# Altium PCB 采集主板V1.1_ZM_20210713.PcbDoc (part 2 of 2)
Units mm, origin at the board's own origin, x right, y up, seen from the top; angles counter-clockwise.
Board outline 130 x 65 mm, 4 copper layers (Top Layer, GND, Power, Bottom Layer), stack 0.778 mm thick; 185 components, 114 nets, 544 pads, 485 vias.
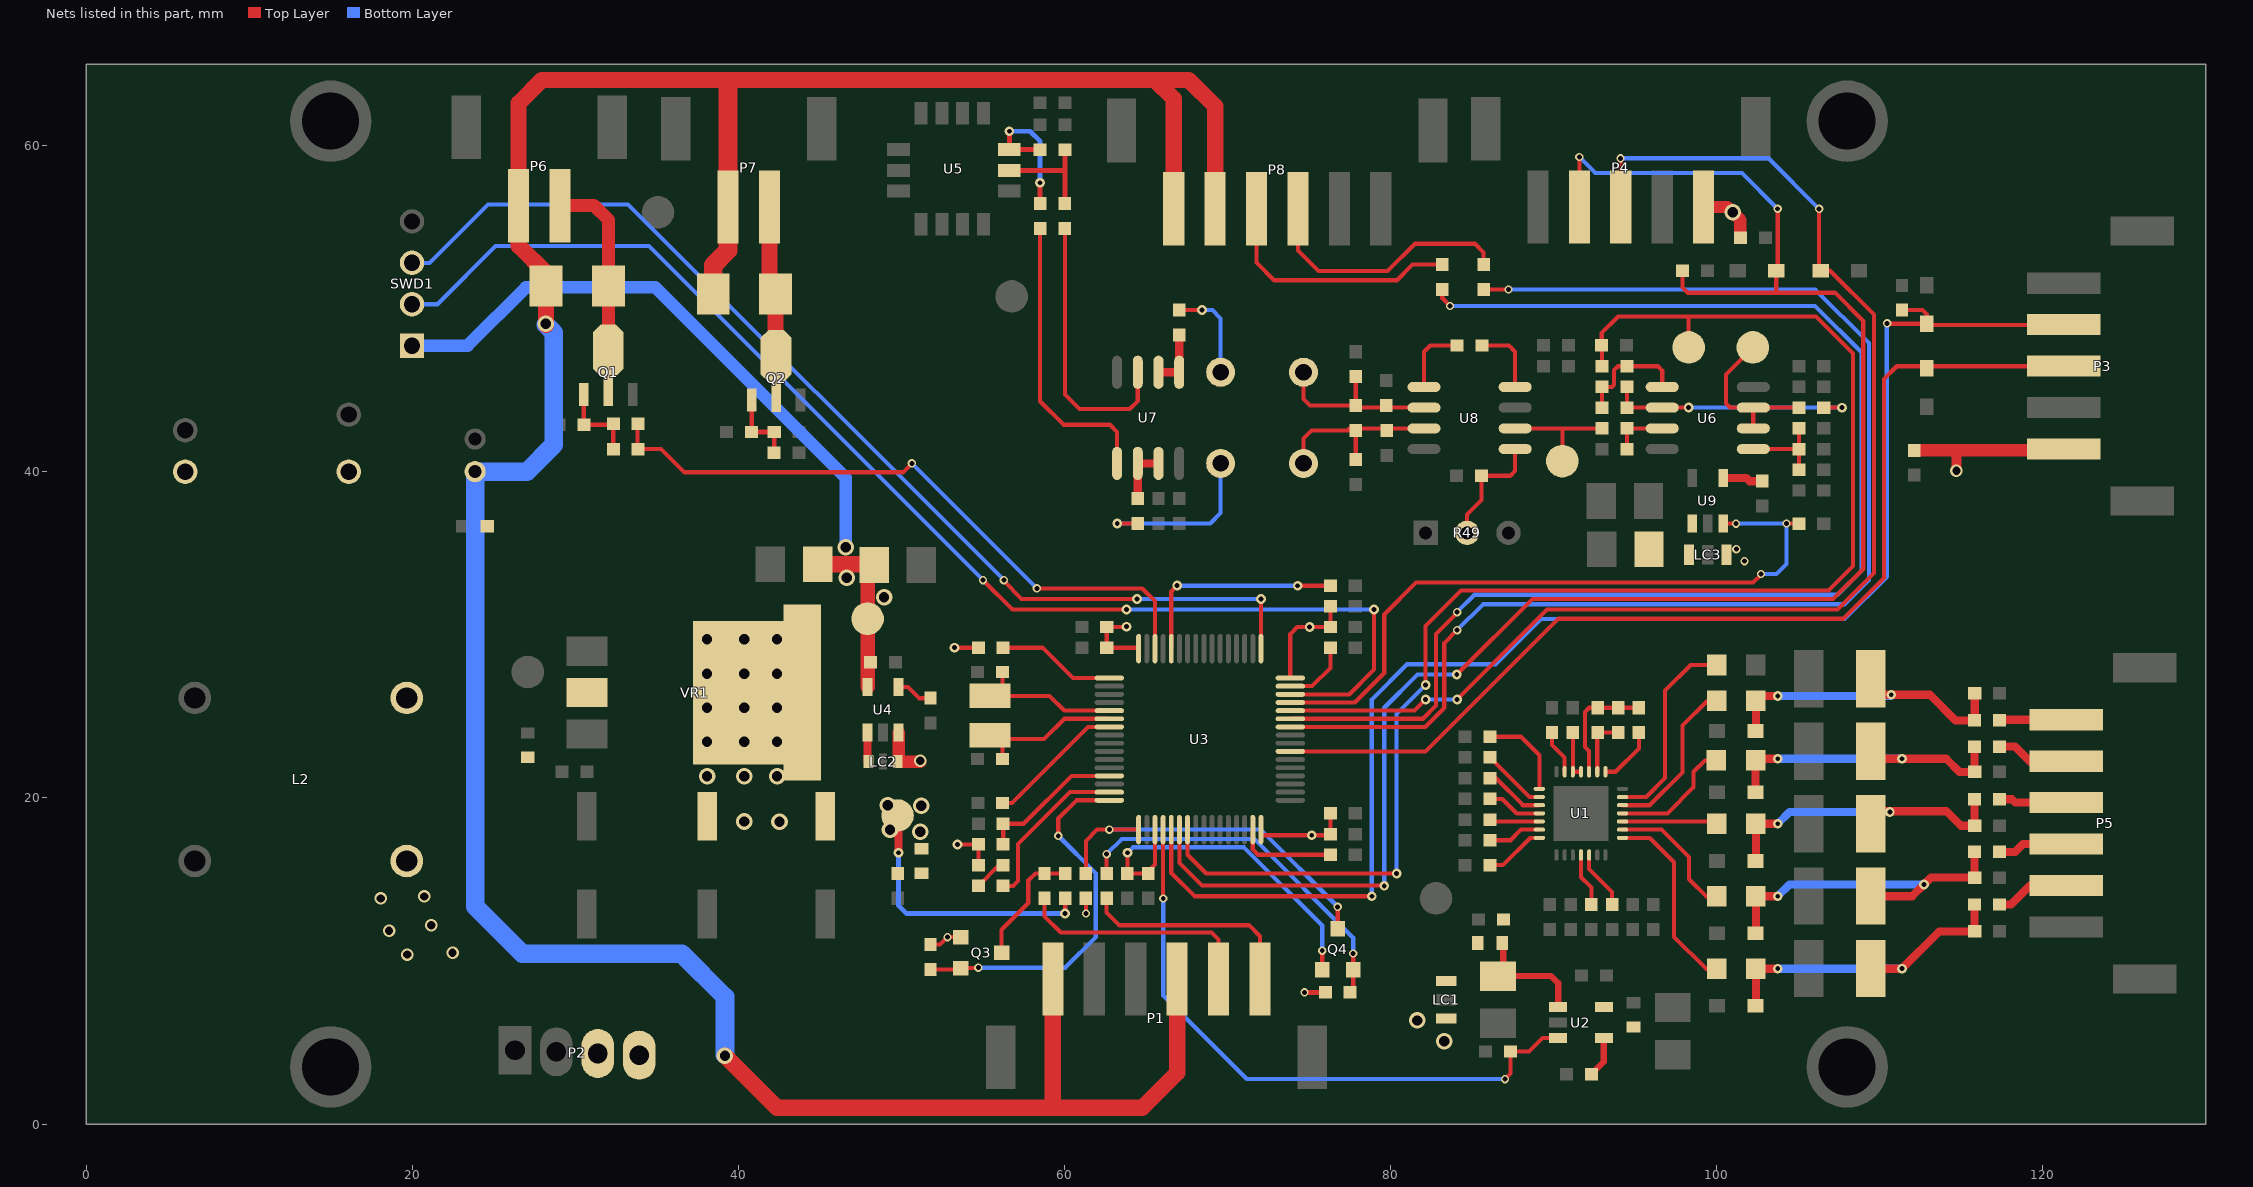
[diagram p4: the nets of this part, all layers, seen from the top]

## Via types
v1: diameter 0.762, hole 0.508, Top Layer to Bottom Layer, tented both sides, 331 vias
v2: diameter 1.016, hole 0.635, Top Layer to Bottom Layer, tented both sides, 61 vias
v3: diameter 0.6, hole 0.3, Top Layer to Bottom Layer, tented both sides, 49 vias
v4: diameter 0.508, hole 0.305, Top Layer to Bottom Layer, tented both sides, 44 vias

## Nets (pads, with @x,y where several pads share a name; then routed paths per layer and width w, separated by ;. In a path a pad name is that pad's centre, name@x,y a point inside that pad or via, vN(x,y) a via of type N, cw(c..) or ccw(c..) an arc to the next point about the centre after c; other vN are vias at no path point) (continued)
NetC3_1: C3.1 C4.1 C5.2 FB3.1 VR1.2 | length 0.1
  Top Layer w1: C4.1@45.32,18.875 C4.1@45.368,18.923
  other v2: 40.367,18.55 42.526,18.542 38.081,21.336 40.367,21.336 42.375,21.336 38.081,23.431 40.367,23.431 42.375,23.431 38.081,25.527 40.367,25.527 42.375,25.527 38.081,27.622 40.367,27.622 42.375,27.622 38.081,29.718 40.367,29.718 42.375,29.718
NetC6_2: C6.2 U1.26 | length 3.6
  Top Layer w0.254: U1.26@92.175,16.5 92.175,15.629 93.58,14.224 C6.2@93.58,13.462
NetC7_1: C7.1 R22.1 U1.9 | length 3.7
  Top Layer w0.254: U1.9@92.675,21.6 C7.1@92.675,23.987 ; C7.1@92.691,24.003 R22.1@93.961,24.003
NetC7_2: C7.2 R20.2 R22.2 U1.10 | length 7.2
  Top Layer w0.254: U1.10@92.175,21.6 92.175,22.868 91.929,23.114 91.929,25.273 92.183,25.527 C7.2@92.691,25.527 R22.2@93.961,25.527 R20.2@95.231,25.527
NetC8_2: C8.2 U1.11 U1.12 | length 2.9
  Top Layer w0.254: C8.2@91.167,24.003 91.175,23.995 U1.12@91.175,21.6 U1.11@91.675,21.6
NetC13_1: C13.1 C66.1 FB1.2 U2.1 | length 7.7
  Top Layer w0.381: FB1.2@86.913,11.282 86.913,9.388 C13.1@86.595,9.07 89.844,9.07 90.275,8.639 U2.1@90.275,7.173
NetC16_1: C16.1 Q1.1 R27.1 R29.1 | length 5.2
  Top Layer w0.254: Q1.1@30.522,44.742 R29.1@30.522,42.886 32.274,42.886 R27.1@32.331,42.943 C16.1@32.331,41.39
NetC17_1: C17.1 Q2.1 R28.1 R30.1 | length 4.6
  Top Layer w0.3: Q2.1@40.819,44.393 40.819,42.461 R30.1@40.795,42.437 R28.1@42.202,42.437 42.202,41.177 C17.1@42.192,41.167
NetC20_2: C20.2 U3.31 | length 6.1
  Top Layer w0.254: U3.31@71.55,18.05 71.55,16.823 71.863,16.51 C20.2@76.308,16.51
NetC21_2: C21.2 U3.47 | length 4.2
  Top Layer w0.254: U3.47@73.85,26.85 75.19,26.85 76.308,27.968 C21.2@76.308,29.21
NetC22_2: C22.2 L1.1 U3.13 | length 9
  Top Layer w0.254: L1.1@56.242,17.145 C22.2@56.242,18.415 57.488,18.415 60.423,21.35 U3.13@62.75,21.35
NetC23_1: C23.1 U3.7 | length 8.5
  Top Layer w0.254: C23.1@56.212,19.685 56.775,19.685 61.44,24.35 U3.7@62.75,24.35
NetC35_2: C35.2 C39.1 C40.1 R36.1 U8.2 | length 10.9
  Top Layer w0.254: C35.2@74.657,46.101 74.657,44.45 75.05,44.057 C40.1@77.86,44.057 C39.1@77.86,45.835 ; C40.1@77.987,43.93 U8.2@82.051,43.93
NetC36_1: C36.1 R35.1 R43.2 U6.2 | length 15.5
  Top Layer w0.254: C36.1@94.497,45.2 R35.1@94.497,43.93 U6.2@96.656,43.93 v3@98.267,43.93 ; R43.2@106.562,43.93 v3(107.677,43.93)
  Bottom Layer w0.254: v3(98.279,43.942) v3@107.665,43.942
NetC36_2: C36.2 R35.2 R38.1 U6.1 | length 7.1
  Top Layer w0.254: R35.2@92.973,43.93 C36.2@92.973,45.2 93.568,45.2 93.707,45.339 93.707,46.228 93.949,46.47 R38.1@94.497,46.47 96.386,46.47 96.656,46.2 U6.1@96.656,45.2
NetC40_2: C40.2 C44.2 C48.1 R42.2 U8.3 | length 11.3
  Top Layer w0.254: C48.1@74.657,40.513 74.657,42.037 75.153,42.533 C40.2@77.86,42.533 C44.2@77.86,40.755 ; 77.463,42.66 U8.3@82.051,42.66
NetC41_1: C41.1 R41.2 U5.14 | length 9
  Top Layer w0.3: v3(56.618,60.878) U5.14@56.618,59.752 C41.1@58.506,59.752 ; R41.2@58.506,56.45 v3(58.506,57.72)
  Bottom Layer w0.3: v3(56.618,60.878) 57.888,60.878 58.506,60.26 v3(58.506,57.72)
NetC41_2: C41.2 R37.2 U5.13 | length 6.7
  Top Layer w0.3: U5.13@56.618,58.482 60.03,58.482 ; R37.2@60.03,56.45 60.03,58.482 ; C41.2@60.03,59.752 60.03,58.482
NetC42_2: C42.2 R39.2 U6.3 | length 3.4
  Top Layer w0.254: C42.2@94.497,41.39 R39.2@94.497,42.66 U6.3@96.656,42.66
NetC43_1: C43.1 R38.2 TP7.1 U3.23 | length 92.2
  Top Layer w0.254: U3.23@67.55,18.05 67.55,16.51 68.693,15.367 v3(80.372,15.367) ; v3(82.15,26.924) 82.15,30.542 84.32,32.712 106.867,32.712 108.366,34.211 108.366,47.242 106.078,49.53 98.279,49.53 ; C43.1@92.945,47.752 92.945,48.514 93.961,49.53 98.279,49.53 ; R38.2@92.973,46.47 C43.1@92.973,47.724 ; TP7.1@98.279,47.625 98.279,49.53
  Bottom Layer w0.254: v3(80.372,15.367) 80.372,25.146 v3(82.15,26.924)
NetC45_2: C45.2 R49.2 U8.5 | length 7.4
  Top Layer w0.254: R49.2@84.69,36.25 84.69,37.383 85.579,38.272 C45.2@85.579,39.751 87.336,39.751 87.639,40.054 U8.5@87.639,41.39
NetC49_2: C49.2 R44.2 R45.2 U6.5 | length 5.3
  Top Layer w0.254: U6.5@102.244,41.39 R45.2@105.038,41.39 ; R44.2@105.038,40.12 R45.2@105.038,41.39 ; C49.2@105.038,42.66 R45.2@105.038,41.39
NetC50_1: C50.1 LC3.1 U9.1
NetC57_2: C57.2 U2.4 | length 2.5
  Top Layer w0.381: C57.2@92.31,3.048 93.075,3.813 U2.4@93.075,5.273
NetC64_2: C64.2 U9.4 | length 2.5
  Top Layer w0.508: U9.4@100.4,39.615 101.814,39.615 102.008,39.422 C64.2@102.795,39.422
NetC65_2: C65.2 U4.4 | length 2.2
  Top Layer w0.254: U4.4@49.826,26.8 50.392,26.8 51.08,26.112 C65.2@51.783,26.112
NetC67_2: C67.2 DS5.1 R17.1 R25.2 TVS9.2 | length 19
  Top Layer w0.5: TVS9.2@102.4,24.295 R17.1@102.4,25.95 102.4,26.15 102.505,26.255 v3(103.74,26.255) ; DS5.1@109.4,26.255 109.87,26.255 109.941,26.326 v3(110.705,26.326) 113.072,26.326 114.644,24.754 R25.2@115.813,24.754 115.824,24.765 C67.2@115.824,26.416
  Bottom Layer w0.5: v3(103.74,26.255) v3@110.705,26.255
NetC68_2: C68.2 DS4.1 R16.1 R47.2 TVS8.2 | length 19.3
  Top Layer w0.5: TVS8.2@102.38,20.35 R16.1@102.38,22.3 102.38,22.38 102.4,22.4 v3(103.74,22.4) ; DS4.1@109.45,22.4 v3(111.36,22.4) 114.076,22.4 114.886,21.59 C68.2@115.824,21.59 115.813,21.601 R47.2@115.813,23.141
  Bottom Layer w0.5: v3(103.74,22.4) v3(111.36,22.4)
NetC69_2: C69.2 DS3.1 R15.1 R51.2 TVS7.2 | length 19.5
  Top Layer w0.5: TVS7.2@102.4,16.149 R15.1@102.4,18.415 v3(103.74,18.415) ; DS3.1@109.45,18.415 110.212,19.177 114.099,19.177 114.988,18.288 C69.2@115.824,18.288 115.813,18.299 R51.2@115.813,19.914
  Bottom Layer w0.5: v3(103.74,18.415) 104.461,19.136 v3(110.616,19.136)
NetC70_2: C70.2 DS2.1 R13.1 R52.2 TVS6.2 | length 21.3
  Top Layer w0.5: TVS6.2@102.4,11.704 R13.1@102.4,13.97 v3(103.74,13.97) ; DS2.1@109.45,13.97 111.991,13.97 v3(112.713,14.692) 113.134,15.113 C70.2@115.824,15.113 115.813,15.124 R52.2@115.813,16.688
  Bottom Layer w0.5: v3(103.74,13.97) 104.462,14.692 v3(112.713,14.692)
NetC71_2: C71.2 DS1.1 R11.1 R53.2 TVS5.2 | length 20.2
  Top Layer w0.5: TVS5.2@102.4,7.259 R11.1@102.4,9.525 v3(103.74,9.525) ; DS1.1@109.45,9.525 v3(111.36,9.525) 113.646,11.811 C71.2@115.824,11.811 115.813,11.822 R53.2@115.813,13.462
  Bottom Layer w0.5: v3(103.74,9.525) v3(111.36,9.525)
NetD1_1: D1.1 P6.2 Q1.2 | length 11.3
  Top Layer w0.8: P6.2@29.064,56.321 31.157,56.321 32.034,55.443 D1.1@32.034,51.397 32.034,47.454 Q1.2@32.022,47.442
NetD2_1: D2.1 P7.2 Q2.2 | length 11.3
  Top Layer w0.8: Q2.2@42.319,46.193 Q2.2@42.319,47.093
  Top Layer w1: P7.2@41.909,56.236 41.909,51.273 D2.1@42.282,50.9 42.282,46.23 Q2.2@42.319,46.193 ; Q2.2@42.319,47.093 Q2.2@42.422,47.196
NetFB1_1: FB1.1 LC1.1
NetFB2_1: FB2.1 U2.5
NetLC2_1: LC2.1 U4.1 | length 1.8
  Top Layer w0.5: U4.1@47.926,24 47.926,22.275 LC2.1@47.976,22.225
NetLED1_1: LED1.1 R26.2 | length 2.1
  Top Layer w0.254: LED1.1@54.718,14.605 55.988,15.875 R26.2@56.242,15.875
NetLED1_2: LED1.2 U3.15 | length 10.2
  Top Layer w0.254: LED1.2@56.242,14.605 56.855,14.605 57.161,14.911 57.161,17.175 60.336,20.35 U3.15@62.75,20.35
NetP3_2: P3.2 R5.2 TVS1.2 U3.21 | length 90.9
  Top Layer w0.254: U3.21@66.55,18.05 66.55,15.399 67.979,13.97 v3(78.848,13.97) ; v4(110.45,49.104) 110.479,49.075 TVS1.2@112.884,49.075 112.884,49.656 112.629,49.911 R5.2@111.36,49.911 ; TVS1.2@112.884,49.01 121.273,49.01 P3.2@121.285,49.022
  Bottom Layer w0.254: v3(78.848,13.97) 78.848,26.035 81.007,28.194 86.429,28.194 89.209,30.975 107.843,30.975 110.429,33.56 v4@110.429,49.049
NetP3_3: P3.3 TVS4.2 U3.39 | length 64.4
  Top Layer w0.254: U3.39@73.85,22.85 82.15,22.85 90.288,30.988 107.763,30.988 110.264,33.489 110.264,45.695 111.039,46.47 121.273,46.47 P3.3@121.285,46.482
NetP4_2: P4.2 R6.2 TVS2.2 U3.22 | length 108.7
  Top Layer w0.254: U3.22@67.05,18.05 67.05,16.009 68.434,14.625 v3@79.61,14.625 ; v3(84.055,27.559) 88.696,32.2 107.138,32.2 108.985,34.047 108.985,49.238 107.242,50.981 103.65,50.981 ; P4.2@91.576,56.236 v4(91.576,59.297) ; R6.2@97.898,52.324 97.898,51.302 98.219,50.981 103.65,50.981 ; TVS2.2@103.65,52.324 103.65,50.981 ; TVS2.2@103.74,52.414 v4@103.74,56.122
  Bottom Layer w0.254: v3(79.61,14.605) 79.61,25.527 81.642,27.559 v3(84.055,27.559) ; v4(91.576,59.297) 92.553,58.32 101.542,58.32 v4(103.735,56.127) v4@103.74,56.122
NetP4_3: P4.3 TVS3.2 U3.44 | length 79.7
  Top Layer w0.254: U3.44@73.85,25.35 81.465,25.35 v3(82.15,26.035) ; v3(84.083,26.035) 89.598,31.55 107.402,31.55 109.644,33.791 109.644,49.63 106.95,52.324 TVS3.2@106.37,52.324 ; P4.3@94.116,56.236 v4@94.116,59.252 ; TVS3.2@106.28,52.414 v4(106.28,56.122)
  Bottom Layer w0.254: v3(82.15,26.035) v3(84.083,26.035) ; v4(94.093,59.223) 103.179,59.223 v4(106.28,56.122)
NetP5_1: P5.1 R25.1 | length 4.1
  Top Layer w0.5: R25.1@117.337,24.754 117.373,24.79 P5.1@121.438,24.79
NetP5_2: P5.2 R47.1 | length 4.5
  Top Layer w0.5: R47.1@117.337,23.141 118.284,23.141 119.174,22.25 P5.2@121.438,22.25
NetP5_3: P5.3 R51.1 | length 4.2
  Top Layer w0.5: R51.1@117.337,19.914 118.102,19.914 118.306,19.71 P5.3@121.438,19.71
NetP5_4: P5.4 R52.1 | length 4.3
  Top Layer w0.5: R52.1@117.337,16.688 118.303,16.688 118.784,17.17 P5.4@121.438,17.17
NetP5_5: P5.5 R53.1 | length 4.6
  Top Layer w0.5: R53.1@117.337,13.462 118.043,13.462 119.211,14.63 P5.5@121.438,14.63
NetP8_3: P8.3 R33.1 | length 15.5
  Top Layer w0.254: P8.3@71.777,56.127 71.777,52.826 72.862,51.741 80.385,51.741 81.349,52.705 R33.1@83.166,52.705
NetP8_4: P8.4 R34.1 | length 16
  Top Layer w0.254: P8.4@74.317,56.127 74.317,53.563 75.569,52.311 79.816,52.311 81.486,53.982 85.175,53.982 85.706,53.451 R34.1@85.706,52.82
NetQ3_2: Q3.2 R54.1 U3.16 | length 22.8
  Top Layer w0.254: R54.1@51.783,9.477 53.557,9.477 Q3.2@53.64,9.56 54.692,9.56 v4(54.717,9.585) ; v4(59.618,17.676) 59.618,18.731 60.738,19.85 U3.16@62.75,19.85
  Bottom Layer w0.254: v4(54.717,9.585) 60.049,9.585 61.922,11.458 61.922,15.373 v4(59.618,17.676)
NetQ3_3: Q3.3 R3.2 R4.1 | length 7.7
  Top Layer w0.254: Q3.3@56.14,10.51 56.14,11.915 57.777,13.552 57.777,14.929 58.215,15.367 R3.2@58.777,15.367 R4.1@60.047,15.367 R4.1@60.125,15.445
NetQ4_2: Q4.2 R1.2 R2.2 | length 22.6
  Top Layer w0.254: R2.2@62.587,15.367 v4(62.587,16.55) ; R1.2@77.52,8.071 77.708,8.259 Q4.2@77.708,9.466 v4(77.708,10.459)
  Bottom Layer w0.254: v4(62.587,16.55) 63.515,17.478 71.648,17.478 77.708,11.419 v4(77.708,10.459)
NetQ4_3: Q4.3 R55.2 U3.17 | length 22.8
  Top Layer w0.254: R55.2@61.317,15.367 61.317,17.364 62.003,18.05 v4(62.75,18.05) U3.17@64.55,18.05 ; Q4.3@76.758,11.966 v4(76.758,13.322)
  Bottom Layer w0.254: v4(62.75,18.05) 72.03,18.05 v4(76.758,13.322)
NetR7_2: R7.2 U1.20 | length 3.3
  Top Layer w0.254: R7.2@86.087,17.399 87.357,17.399 88.008,18.05 U1.20@89.125,18.05
NetR8_2: R8.2 U1.19 | length 3.1
  Top Layer w0.254: R8.2@86.087,18.669 86.206,18.55 U1.19@89.125,18.55
NetR9_2: R9.2 U1.18 | length 3.4
  Top Layer w0.254: R9.2@86.087,19.939 86.849,19.939 87.738,19.05 U1.18@89.125,19.05
NetR10_2: R10.2 U1.17 | length 3.7
  Top Layer w0.254: R10.2@86.087,21.209 86.449,21.209 88.108,19.55 U1.17@89.125,19.55
NetR11_2: R11.2 U1.1 | length 11.8
  Top Layer w0.254: U1.1@94.225,17.55 95.891,17.55 97.39,16.051 97.39,11.476 99.341,9.525 R11.2@100,9.525
NetR12_2: R12.2 U1.16 | length 4
  Top Layer w0.254: R12.2@86.087,22.479 88.516,20.05 U1.16@89.125,20.05
NetR13_2: R13.2 U1.2 | length 8.3
  Top Layer w0.254: U1.2@94.225,18.05 96.624,18.05 98.307,16.367 98.307,15.011 99.348,13.97 R13.2@100,13.97
NetR14_2: R14.2 U1.15 | length 5.6
  Top Layer w0.254: R14.2@86.087,23.749 87.989,23.749 89.125,22.613 U1.15@89.125,20.55
NetR15_2: R15.2 U1.3 | length 5.6
  Top Layer w0.254: U1.3@94.225,18.55 R15.2@99.865,18.55
NetR16_2: R16.2 U1.4 | length 7.7
  Top Layer w0.254: U1.4@94.225,19.05 96.981,19.05 98.586,20.655 98.586,21.6 99.286,22.3 R16.2@99.98,22.3 ; R16.2@99.98,22.4 R16.2@100,22.4
NetR17_2: R17.2 U1.5 | length 10.1
  Top Layer w0.254: U1.5@94.225,19.55 95.894,19.55 97.898,21.554 97.898,24.427 99.421,25.95 R17.2@100,25.95
NetR18_2: R18.2 U1.21 | length 3.7
  Top Layer w0.254: R18.2@86.087,15.875 86.887,15.875 88.562,17.55 U1.21@89.125,17.55
NetR19_2: R19.2 U1.6 | length 12.3
  Top Layer w0.254: U1.6@94.225,20.05 95.68,20.05 96.839,21.209 96.839,26.58 98.409,28.15 R19.2@100,28.15
NetR20_1: R20.1 U1.8 | length 3.6
  Top Layer w0.254: U1.8@93.175,21.6 93.799,21.6 95.231,23.032 R20.1@95.231,24.003
NetR21_2: R21.2 U1.13 | length 2.7
  Top Layer w0.254: R21.2@89.897,24.003 89.897,23.241 90.675,22.463 U1.13@90.675,21.6
NetR23_2: R23.2 U1.25 | length 3.3
  Top Layer w0.254: U1.25@91.675,16.5 91.675,15.133 92.31,14.498 R23.2@92.31,13.462
NetR24_1: R24.1 U2.3 U3.20 | length 38.4
  Top Layer w0.254: v4@66.05,13.835 U3.20@66.05,18.05 ; v4(87.021,2.753) 87.357,3.089 R24.1@87.357,4.445 88.49,4.445 89.318,5.273 U2.3@90.275,5.273
  Bottom Layer w0.254: v4(66.057,13.835) 66.057,7.875 71.179,2.753 v4(87.021,2.753)
NetR31_2: R31.2 U3.1 | length 7.3
  Top Layer w0.254: R31.2@56.242,29.21 58.655,29.21 60.515,27.35 U3.1@62.75,27.35
NetR32_1: R32.1 U3.60 | length 13.4
  Top Layer w0.254: U3.60@66.55,29.15 66.55,32.66 v3(66.91,33.02) ; v3(74.301,33.007) 76.295,33.007 R32.1@76.308,33.02
  Bottom Layer w0.254: v3(66.91,33.02) 66.923,33.007 v3(74.301,33.007)
NetR37_1: R37.1 U7.3 | length 17
  Top Layer w0.254: R37.1@60.03,54.926 60.03,44.734 60.921,43.843 64.004,43.843 64.497,44.336 U7.3@64.497,46.101
NetR39_1: R39.1 TP6.1 U8.6 | length 7.4
  Top Layer w0.254: U8.6@87.639,42.66 90.578,42.66 ; TP6.1@90.532,40.65 90.532,42.614 90.578,42.66 ; R39.1@92.973,42.66 90.578,42.66
NetR40_1: R40.1 U8.1 | length 4.3
  Top Layer w0.254: U8.1@82.051,45.2 82.051,47.359 82.432,47.74 R40.1@84.083,47.74
NetR40_2: R40.2 U8.8 | length 4.3
  Top Layer w0.254: R40.2@85.607,47.74 87.258,47.74 87.639,47.359 U8.8@87.639,45.2
NetR41_1: R41.1 U7.5 | length 18
  Top Layer w0.254: R41.1@58.506,54.926 58.506,44.324 59.943,42.886 62.777,42.886 63.227,42.437 U7.5@63.227,40.513
NetR43_1: R43.1 TP9.1 U6.6 U6.7 | length 10
  Top Layer w0.254: TP9.1@102.216,47.625 100.565,45.974 100.565,44.196 100.831,43.93 U6.7@102.244,43.93 ; U6.6@102.244,42.66 U6.7@102.244,43.93 ; R43.1@105.038,43.93 U6.7@102.244,43.93
NetR46_1: R46.1 U3.45 U9.3 | length 43.2
  Top Layer w0.254: U3.45@73.85,25.85 77.802,25.85 79.61,27.658 79.61,31.242 81.568,33.2 102.224,33.2 v4@102.734,33.71 ; U9.3@100.4,36.815 v4@101.185,36.815 ; v4@104.273,36.818 R46.1@105.038,36.818
  Bottom Layer w0.254: v4(101.185,36.818) 104.261,36.818 v4(104.273,36.83) 104.273,34.343 103.662,33.732 v4(102.721,33.732)
NetR48_2: R48.2 U7.1 U7.2 | length 3.6
  Top Layer w0.5: U7.2@65.767,46.101 U7.1@67.037,46.101 67.037,48.374 R48.2@67.05,48.387
NetR50_2: R50.2 U7.6 U7.7 | length 3.4
  Top Layer w0.5: R50.2@64.5,38.354 64.497,38.357 U7.6@64.497,40.513 U7.7@65.767,40.513
OSC_IN: C26.2 U3.5 Y1.2 | length 8.8
  Top Layer w0.254: Y1.2@55.45,26.272 Y1.2@55.43,26.252 59.084,26.252 59.986,25.35 U3.5@62.75,25.35 ; Y1.2@56.192,26.622 C26.2@56.192,27.719
OSC_OUT: C34.2 U3.6 Y1.1 | length 9.2
  Top Layer w0.254: Y1.1@55.43,23.613 Y1.1@56.192,23.613 ; C34.2@56.192,22.385 Y1.1@56.192,23.613 ; Y1.1@56.192,23.798 Y1.1@56.192,23.613 ; U3.6@62.75,24.85 59.991,24.85 58.754,23.613 Y1.1@56.192,23.613
RXD: P1.2 R3.1 | length 14.8
  Top Layer w0.254: R3.1@58.777,13.843 58.777,12.731 59.77,11.738 69.015,11.738 69.45,11.303 P1.2@69.45,8.89
SWCLK: SWD1.3 U3.49 | length 66.6
  Top Layer w0.254: v4@56.28,33.291 57.371,32.2 v3(64.45,32.2) ; U3.49@72.05,29.15 v3(72.05,32.2)
  Bottom Layer w0.254: SWD1.3@19.988,52.812 21.069,52.812 24.646,56.388 33.242,56.388 v4(56.28,33.35) ; v3(64.45,32.2) v3(72.05,32.2)
SWDIO: SWD1.2 U3.46 | length 79
  Top Layer w0.254: v4@55.135,33.225 56.81,31.55 v3(63.8,31.55) ; U3.46@73.85,26.35 77.463,26.35 78.975,27.862 v3(78.975,31.55)
  Bottom Layer w0.254: SWD1.2@19.988,50.272 21.541,50.272 25.117,53.848 34.512,53.848 v4(55.01,33.35) ; v3(63.8,31.55) v3(78.975,31.55)
TST+: C48.2 R50.1 | length 10.9
  Top Layer w0.254: v3(63.239,36.83) R50.1@64.5,36.83
  Bottom Layer w0.254: v3(63.239,36.83) 68.942,36.83 69.577,37.465 C48.2@69.577,40.513
TST-: C35.1 R48.1 | length 6
  Top Layer w0.254: R48.1@67.05,49.911 v3(68.434,49.911)
  Bottom Layer w0.254: v3(68.434,49.911) 69.069,49.911 69.577,49.403 C35.1@69.577,46.101
TXD: P1.1 R2.1 | length 13.5
  Top Layer w0.254: R2.1@62.587,13.843 62.587,12.961 63.356,12.192 71.312,12.192 71.99,11.514 P1.1@71.99,8.89
US1_RX: R33.2 U3.43 | length 82.4
  Top Layer w0.254: U3.43@73.85,24.85 81.981,24.85 82.785,25.654 82.785,30.054 v4@84.102,31.371 ; R33.2@83.166,51.181 83.166,50.65 v4(83.649,50.167)
  Bottom Layer w0.254: v4(83.649,50.167) 106.032,50.167 108.872,47.328 108.872,33.926 107.402,32.456 85.149,32.456 v4(84.083,31.39)
US1_TX: R34.2 U3.42 | length 81.2
  Top Layer w0.254: U3.42@73.85,24.35 82.123,24.35 83.239,25.466 83.239,25.473 83.293,25.527 83.293,29.492 v4(84.083,30.282) v4@84.182,30.381 ; R34.2@85.706,51.181 v4(87.23,51.181)
  Bottom Layer w0.254: v4(84.083,30.282) 85.671,31.87 107.843,31.87 109.335,33.362 109.335,47.884 106.039,51.181 v4(87.23,51.181)
V5.0: C59.2 C63.2 FB3.2 LC1.3 LC2.3 LC3.3 P3.5 P4.5 R1.1 R4.2 TP2.1 U4.3 | length 35.2
  Top Layer w0.3: v3(60.03,12.916) 60.047,12.933 R4.2@60.047,13.843 ; v4(74.722,8.071) R1.1@75.996,8.071
  Top Layer w0.5: v3(49.826,16.637) TP2.1@49.826,19.05
  Top Layer w0.6: v1(114.7,40.054) 114.7,40.95
  Top Layer w0.762: U4.3@49.826,24 49.826,22.275 LC2.3@49.776,22.225 v1@51.162,22.225 ; P4.5@99.196,56.236 100.65,56.236 v2(100.978,55.908) 101.454,55.432 C59.2@101.454,54.358 ; C63.2@112.108,41.311 121.194,41.311 P3.5@121.285,41.402
  Bottom Layer w0.3: v3(49.826,16.637) 49.826,13.387 50.297,12.916 v3(60.03,12.916)
  other v1: 51.162,22.275
  other v2: 83.293,5.08 81.642,6.35 51.162,17.924 49.299,18.051 51.226,19.508 49.152,19.55
  other v4: 101.71,34.517 101.2,35.25
V12: C58.2 C60.1 C61.1 C62.1 D1.2 D2.2 FB4.1 L2.2 P1.3 P1.6 P6.1 P7.1 P8.1 P8.2 | length 190.9
  Top Layer w1: v2@28.204,49.01 D1.2@28.204,51.397 28.204,52.186 26.524,53.867 P6.1@26.524,56.321 26.524,62.603 27.95,64.029 65.538,64.029 ; v2(39.178,4.19) 42.374,0.994 59.275,0.994 ; P1.6@59.29,8.89 59.29,1.009 59.275,0.994 ; P8.1@66.697,56.127 66.697,62.87 65.538,64.029 ; P1.3@66.91,8.89 66.91,3.139 64.765,0.994 59.275,0.994 ; P8.2@69.237,56.127 69.237,62.405 67.613,64.029 65.538,64.029
  Top Layer w1.143: D2.2@38.452,50.9 38.452,52.669 39.369,53.587 P7.1@39.369,56.236 39.369,63.85 39.476,63.958
  Bottom Layer w1.143: v2@28.204,49.01 28.686,48.528 28.686,41.651 27.04,40.005 C62.1@23.857,40.005 23.857,13.341 26.759,10.439 36.532,10.439 39.178,7.793 v2@39.178,4.251
  other v2: 28.19,49.075
VALUE: C16.2 R27.2 U3.62 | length 40.5
  Top Layer w0.254: R27.2@33.825,42.943 33.825,41.42 C16.2@33.855,41.39 35.268,41.39 36.693,39.965 50.095,39.965 v4(50.643,40.513) ; v4@58.344,32.85 64.772,32.85 65.557,32.065 U3.62@65.557,29.15
  Bottom Layer w0.254: v4(50.643,40.513) v4@58.309,32.847
  other v4: 58.304,32.852
VCC: C18.2 C19.2 C24.2 C25.1 C27.2 C28.2 C29.2 C30.2 C31.2 C32.2 C33.1 L1.2 Q3.1 Q4.1 R26.1 R31.1 R54.2 R55.1 SWD1.1 TP5.1 U3.19 U3.32 U3.48 U3.64 U4.5 | length 93.4
  Top Layer w0.254: C33.1@44.865,34.33 C33.1@45,34.465 ; R54.2@51.783,11.001 52.369,11.001 v4(52.829,11.46) Q3.1@53.64,11.46 ; v3@53.258,29.21 v3(53.26,29.21) R31.1@54.718,29.21 ; v3(53.448,17.145) L1.2@54.718,17.145 R26.1@54.718,15.875 ; v4(61.317,12.913) R55.1@61.317,13.843 ; v3(63.8,30.5) 63.78,30.48 C32.2@62.592,30.48 C27.2@62.592,29.21 64.49,29.21 U3.64@64.55,29.15 ; v3(63.874,16.637) 63.862,16.625 C28.2@63.862,15.367 65,15.367 65.55,15.917 U3.19@65.55,18.05 ; U3.32@72.091,17.709 v3(75.165,17.709) C30.2@76.15,17.709 ; U3.48@73.895,27.395 U3.48@73.85,27.35 73.85,30.054 74.276,30.48 v3(75.038,30.48) C18.2@76.308,30.48 C19.2@76.308,31.75 ; Q4.1@75.808,9.466 v4(75.808,10.631) ; C30.2@76.308,17.78 C31.2@76.308,19.05
  Top Layer w0.889: U4.5@47.926,26.8 TP5.1@47.926,30.988 C25.1@47.926,34.229
  Top Layer w1.016: C33.1@44.865,34.33 47.825,34.33 C25.1@47.926,34.229
  Bottom Layer w0.254: v3(63.874,16.637) 64.205,16.967 71.006,16.967 75.808,12.166 v4(75.808,10.631)
  Bottom Layer w0.762: SWD1.1@19.988,47.732 23.396,47.732 26.973,51.308 34.909,51.308 46.59,39.627 v2(46.59,35.379)
  other v2: 48.936,32.311 46.658,33.506
VCC_IN: L2.1 P2.3 P2.4
  other v1: 19.691,10.39 22.475,10.501 18.581,11.849 21.163,12.192 18.07,13.835 20.741,13.957
pads on no net: U1.7 U1.23 U1.24 U3.2 U3.3 U3.4 U3.8 U3.9 U3.10 U3.11 U3.14 U3.24 U3.25 U3.26 U3.27 U3.28 U3.29 U3.30 U3.40 U3.50 U3.56 U3.57 U3.58 U3.59 U5.2 U5.10 U5.11
copper on no net:
  other v1: 61.269,41.496 64.588,42.648

## Polygon pours and split planes (outlines as drawn)
no net on Power "Power-No Net" (solid, remove dead copper, pour order 10): 25,65
VCC on Power "Top Layer-No Net" (solid, remove dead copper, pour order 56): 45.075,36.08 75.449,36.08 75.813,35.715 76.377,35.151 76.377,32.234 76.377,15.524 75.813,14.96 71.359,10.506 52.343,10.506 52.343,27.353 44.553,27.353 44.553,35.557
AV3.3 on Power "Top Layer-No Net" (solid, remove dead copper, pour order 58): 56.607,62.823 75.797,62.821 77.256,61.362 77.256,55.754 77.256,53.428 78.168,52.517 81.451,49.234 91.437,49.234 106.758,49.234 107.214,48.778 108.855,47.136 108.855,39.43 108.855,36.333 107.956,36.333 106.435,36.333 91.939,36.333 91.939,33.503 87.607,33.503 84.187,33.503 83.731,33.959 83.686,34.004 83.686,36.694 83.686,39.202 83.23,39.658 83.093,39.521 78.715,39.521 56.847,39.521 54.444,41.924 54.444,60.66
EVDD on Power "Top Layer-No Net" (solid, remove dead copper, pour order 62): 85.643,28.485 97.502,28.485 97.534,28.517 99.484,28.517 100.05,27.95 100.208,27.793 100.208,12.756 100.208,6.496 99.484,5.773 97.125,5.773 85.373,5.773 84.699,6.446 84.699,22.666 84.699,27.541
EGND on Power "EGND_L01_P080" (solid, remove dead copper, pour order 90): -5.316,69.164 -5.217,69.066 52.635,69.066 52.635,57.623 54.92,57.623 54.92,67.98 97.696,67.98 97.696,35.963 54.92,35.963 54.92,37.098 30.573,37.098 30.573,-1.225 -1.86,-1.225 -5.414,2.329 -3.44,4.303 -3.44,69.461
V5.0 on Power "Top Layer-No Net" (solid, remove dead copper, pour order 96): 34.945,34.181 41.685,34.179 42.522,33.342 42.713,33.152 42.713,28.927 42.713,25.729 42.865,25.577 43.322,25.12 46.557,25.12 51.715,25.12 51.896,24.94 51.896,9.462 72.846,9.462 78.4,15.016 78.4,30.023 80.097,31.72 80.726,32.349 84.69,32.349 91.726,32.349 92.025,32.648 92.039,32.661 92.039,34.182 92.039,34.929 92.546,35.436 92.599,35.49 101.124,35.49 108.97,35.49 109.793,36.313 109.793,37.477 109.793,52.08 98.997,52.08 98.997,63.744 133.049,63.744 133.049,-3.444 114.009,-3.444 39.19,-3.444 37.476,-1.731 33.07,2.675 33.07,5.204 33.07,33.022 34.122,34.074 34.229,34.181
EGND on Top Layer "EGND_L01_P080" (solid, remove dead copper, pour order 80): -3.903,69.991 -3.804,69.893 54.048,69.893 54.048,58.45 56.333,58.45 56.333,68.807 130.262,68.807 130.756,68.313 130.756,38.498 130.756,33.76 102.916,33.76 56.333,33.76 56.333,40.004 54.048,40.004 54.048,31.39 74.276,31.39 131.447,31.39 131.8,31.037 131.8,-0.399 -0.448,-0.399 -4.002,3.155 -2.027,5.13 -2.027,70.287
EGND on GND "EGND_L01_P080" (solid, remove dead copper, pour order 88): -3.903,69.991 -3.804,69.893 54.048,69.893 54.048,58.45 56.333,58.45 56.333,68.807 130.262,68.807 130.756,68.313 130.756,38.498 130.756,33.76 102.916,33.76 56.333,33.76 56.333,40.004 54.048,40.004 54.048,31.39 74.276,31.39 132.168,31.39 132.168,-0.399 -0.448,-0.399 -4.002,3.155 -2.027,5.13 -2.027,70.287
EGND on Bottom Layer "EGND_L01_P080" (solid, remove dead copper, pour order 92): -3.903,69.991 -3.804,69.893 54.048,69.893 54.048,58.45 56.333,58.45 56.333,68.807 130.262,68.807 130.756,68.313 130.756,38.498 130.756,33.76 102.916,33.76 56.333,33.76 56.333,40.004 54.048,40.004 54.048,31.39 74.276,31.39 137.509,31.39 137.509,-0.399 -0.448,-0.399 -4.002,3.155 -2.027,5.13 -2.027,70.287

## Keep-outs
Keep-Out Layer:
  lines w0.2: 0.202,0.194 0.202,64.829 129.724,64.829 129.724,0.194 0.202,0.194
Mechanical 1:
  the board outline again, w0.2

## Other copper
Top Layer:
  rectangle net NetC13_1: 86.151,8.365 87.748,12.939
  rectangle net NetFB1_1: 82.315,8.348 84.27,11.759
  rectangle net NetFB1_1: 82.315,10.501 85.833,11.759
  rectangle net V5.0: 80.896,4.426 84.182,6.858
  region net EVDD: 92.687,9.815 92.694,9.808 96.047,9.808 96.793,10.553 97.558,10.553 98.597,9.514 98.597,6.267 98.5,6.17 96.03,6.17 95.841,6.359 95.841,6.761 95.603,6.999 94.489,6.999 94.093,7.395 94.093,7.955 93.565,8.483 92.727,8.483 92.541,8.669 92.541,9.669 92.687,9.815
  region net NetFB2_1: 92.521,7.567 93.64,7.567 93.73,7.477 93.73,7.113 94.261,6.582 95.261,6.582 95.368,6.476 95.368,5.496 95.312,5.44 95.306,5.446 94.357,5.446 93.097,6.706 92.43,6.706 92.359,6.777 92.359,7.471 92.457,7.57 92.513,7.57
  region net V12: 4.721,41.214 4.83,41.214 21,41.214 21.424,40.79 25.069,40.79 25.796,40.063 25.796,22.96 27.908,22.96 27.984,22.885 27.984,21.874 27.795,21.685 20.676,21.685 17.534,24.826 17.534,26.735 23.839,33.04 23.839,37.513 23.273,38.079 8.834,38.079 4.803,38.079 4.485,38.397 4.485,41.009
  region net NetC1_2: 32.034,24.85 29.326,24.85 29.205,24.73 26.599,24.736 26.524,24.66 26.524,23.242 26.542,23.224 29.191,23.224 29.46,22.955 32.015,22.955 32.034,22.936
  region net NetC3_1: 45.935,20.896 46.349,20.482 46.349,18.651 48.871,16.129 51.966,16.129 52.174,15.921 52.174,14.921 51.975,14.721 47.295,14.721 43.587,18.429 43.587,20.896
  region net V5.0: 48.668,20.35 52.086,20.35 52.391,20.045 52.391,16.629 52.215,16.452 49.061,16.452 48.47,17.043 48.47,20.152 48.651,20.334
  region net VCC_IN: 21.698,19.118 21.698,13.335 24.619,10.414 35.195,10.414 36.204,9.404 36.204,3.228 35.135,2.159 30.715,2.159 30.284,2.59 30.284,6.654 29.158,7.78 21.03,7.78 16.745,12.065 16.745,19.071 17.341,19.667 21.306,19.667
  region net NetC3_1: 29.572,27.35 33.681,27.35 37.192,30.861 38.208,30.861 38.208,22.987 37.319,22.098 37.192,22.098 33.763,25.527 29.572,25.527
  region net NetC3_1: 44.865,23.368 36.303,23.368 36.303,17.78 36.938,17.145 45.931,17.145 46.336,17.55 46.336,20.495 44.865,21.966
  region net NetC50_1: 94.907,36.423 97.737,36.423 98.051,36.737 98.051,37.421 98.176,37.546 98.74,37.546 98.821,37.465 98.815,34.314 98.527,34.025 94.912,34.025 94.674,34.263 94.674,36.206 94.891,36.423
  region net AV3.3: 94.866,39.351 95.742,40.226 98.803,40.226 98.892,40.137 98.892,39.011 98.758,38.877 97.532,38.877 96.962,38.307 96.962,37.234 96.719,36.991 94.865,36.991 94.725,37.132 94.725,39.209
  region net V5.0: 100.304,35.54 101.837,35.544 101.972,35.408 101.972,34.341 101.87,34.239 100.318,34.239 100.304,34.255
  region net VCC: 43.883,35.996 49.171,35.996 49.638,35.529 49.638,30.241 48.687,29.29 48.687,26.356 48.46,26.129 47.463,26.129 47.365,26.227 47.365,29.177 46.463,30.08 46.463,32.482 46.027,32.917 43.819,32.917 43.561,33.175 43.561,35.79 43.767,35.996 43.88,35.996
  region net GND_IN: 0.687,19.55 15.192,19.55 15.954,18.788 15.954,10.904 20.065,6.793 29.402,6.793 29.976,6.219 29.976,1.246 29.277,0.546 0.687,0.546
Power:
  region net GND_IN: 0.687,19.55 11.788,19.55 13.271,18.068 13.271,13.588 20.065,6.793 29.402,6.793 29.976,6.219 29.976,1.246 29.277,0.546 0.687,0.546
GND:
  region net GND_IN: 0.687,19.55 11.788,19.55 13.271,18.068 13.271,13.588 20.065,6.793 29.402,6.793 29.976,6.219 29.976,1.246 29.277,0.546 0.687,0.546
Bottom Layer:
  region net GND_IN: 0.687,19.55 11.788,19.55 13.271,18.068 13.271,13.588 20.065,6.793 29.402,6.793 29.976,6.219 29.976,1.246 29.277,0.546 0.687,0.546

## Silkscreen, mask and mechanical layers (free items; w line width, h text height)
Top Overlay:
  circle w0.5: c15,61.5 r3.3
  circle w0.5: c108,61.5 r3.3
  circle w0.5: c108,3.5 r3.3
  circle w0.5: c15,3.5 r3.3
  text "心音" at 101.2,56.525 h2
  text "主机通讯" at 80.63,55.927 h2
  text "GND" at 14.955,54.75 h1.02
  text "SWCLK" at 12.953,52.348 h1.02
  text "SWDIO" at 13.087,49.838 h1.02
  text "VCC" at 14.955,47.702 h1.02
  text "颈动脉波" at 117.634,35.408 h2
  text "-" at 25.346,8.424 h2
  text "-" at 28.151,8.4 h2
  text "+" at 31.172,8.4 h2
  text "+" at 34.481,8.376 h2
  text "血压计" at 77.211,2.503 h1.5
  text "HD-XXG-V2.2" at 95.231,1.512 h1.5
  text "2021-07-20" at 96.12,0.242 h1.5
Top Solder:
  rectangle: 29.699,25.642 34.271,27.674
  lines w2.54: 78.856,2.443 78.897,5.481 ; 113.295,29.935 122.582,29.935 ; 113.764,5.976 123.051,5.976

## Text inside footprints (layer, text, board x,y; h text height)
C60: Top Overlay "+" at 6.788,40.589 h1.52 r270
C61: Top Overlay "+" at 16.821,41.069 h1.52 r270
C62: Top Overlay "+" at 24.568,40.319 h1.52 r270